# Altium PCB PCB1.PcbDoc
Units mm, origin at the board's own origin, x right, y up, seen from the top; angles counter-clockwise.
Board outline 200 x 100 mm, 2 copper layers (Top Layer, Bottom Layer); 33 components, 24 nets, 144 pads, 32 vias.
Unrouted connection lines stored in the file: 69.
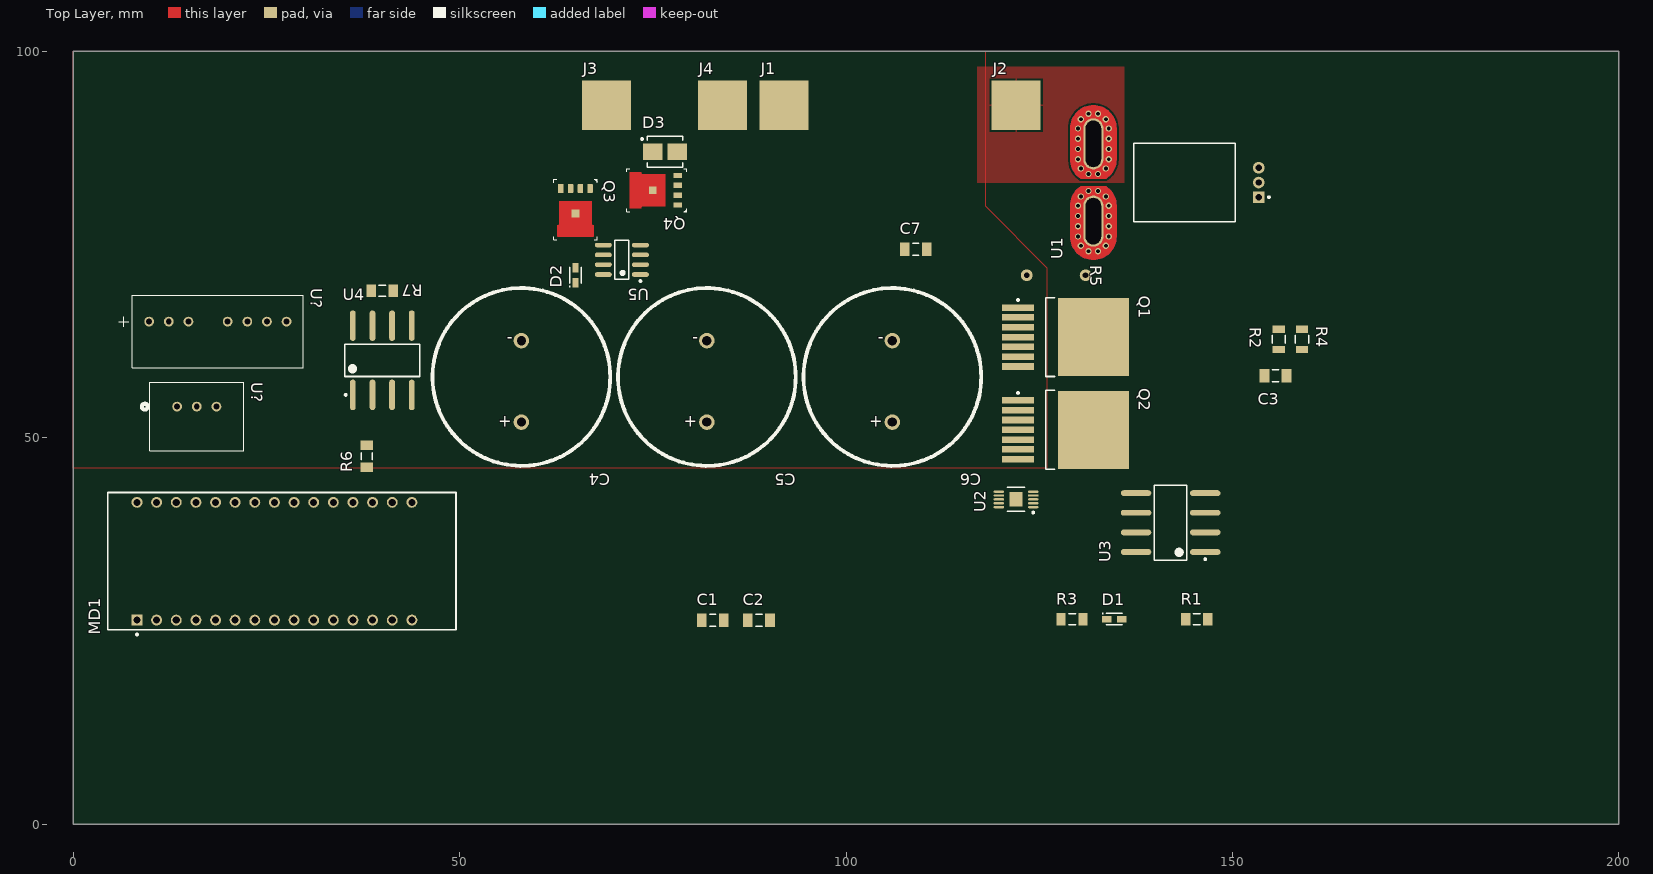
[diagram p0: Top Layer view]
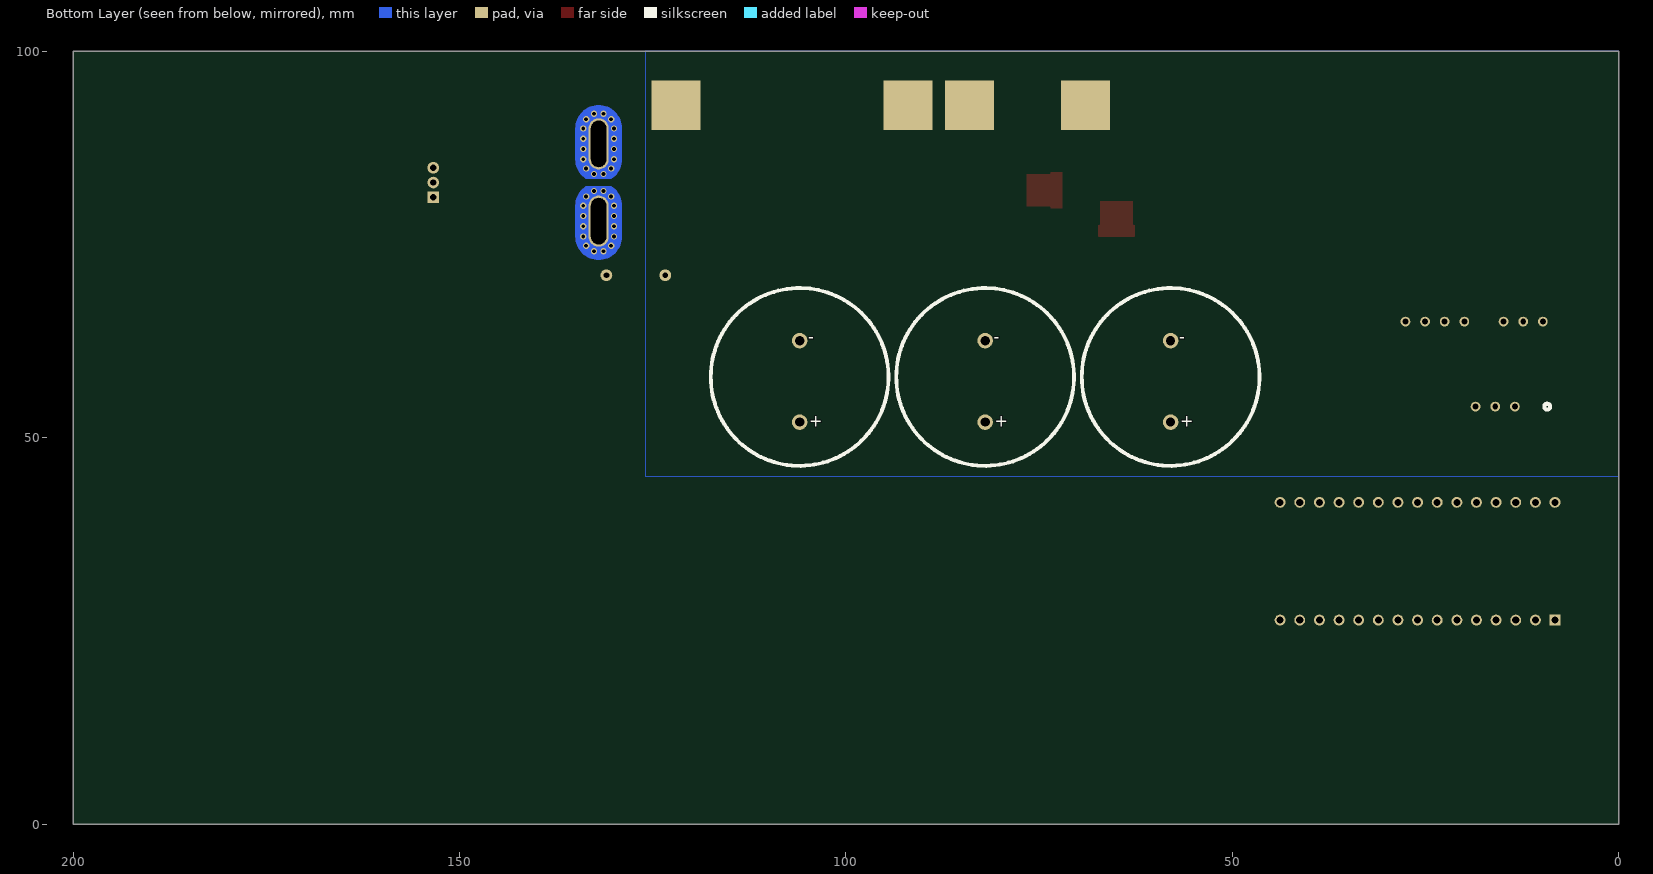
[diagram p1: Bottom Layer view, seen from below]

## Layer stack, top to bottom
Top Solder: solder mask 0.0102, Solder Resist, Dk 3.5
Top Layer: signal copper 0.0356
Dielectric 1: dielectric 0.32, FR-4, Dk 4.8
Bottom Layer: signal copper 0.0356
Bottom Solder: solder mask 0.0102, Solder Resist, Dk 3.5

## Board outline
0,0 0,100 200,100 200,0

## Design rules (kind name [scope] priority, off if disabled: settings)
Clearance [All] p1: gap=0.254 ignorepadtopadclearanceinfootprint=FALSE
PolygonConnect [All] p1: connectstyle=Relief reliefconductorwidth=0.254 reliefentries=4 polygonreliefangle="90 Angle" airgapwidth=0.254
RoutingVias [All] p1: holewidth=0.711 width=1.27 viastyle="Through Hole" minholewidth=0.711 minwidth=1.27 maxholewidth=0.711 maxwidth=1.27
SolderMaskExpansion [All] p1: expansion=0.102 istentingtop=FALSE
SupplyNets "Schematic Supply Nets_5" [InNet('DGND')] p1: voltage=0.000
SupplyNets "Schematic Supply Nets_4" [InNet('+5V_ISO')] p2: voltage=0.000
SupplyNets "Schematic Supply Nets_3" [InNet('BGND')] p3: voltage=0.000
SupplyNets "Schematic Supply Nets_2" [InNet('VDC')] p4: voltage=0.000
SupplyNets "Schematic Supply Nets_1" [InNet('+12V')] p5: voltage=0.000
SupplyNets "Schematic Supply Nets" [InNet('VBAT')] p6: voltage=0.000
Width [All] p1: maxlimit=0.254 minlimit=0.254 preferedwidth=0.254
30 further rules are at their usual default settings.

## Components (designator, comment, footprint, x,y, rotation, side; value= is the part's Value field where it differs from the comment)
C1 "C1206C104K1RACTU" CAPC3216X06N 82.763,26.374 r0 top value=100nF
C2 "C1206C104K1RACTU" CAPC3216X06N 88.732,26.374 r0 top value=100nF
C3 "C1206C104K1RACTU" CAPC3216X06N 155.575,58 r0 top value=100nF
C4 "UVR1J472MRD" UVR1J472MRD-Footprint-1 58,52 r180 top value=4.7mF
C5 "UVR1J472MRD" UVR1J472MRD-Footprint-1 82,52 r180 top value=4.7mF
C6 "UVR1J472MRD" UVR1J472MRD-Footprint-1 106,52 r180 top value=4.7mF
C7 "C1206C104K1RACTU" CAPC3216X06N 109.03,74.374 r0 top value=100nF
D1 "RB021VAM90TR" DIOM2014X08N 134.706,26.501 r0 top
D2 "RB021VAM90TR" DIOM2014X08N 65,71 r90 top
D3 "VSSB310-M3/52T" DIOM4336X24N 76.575,87 r0 top
J1 "GND" "Solder Pad" 92,93 r0 top
J2 "Battery" "Solder Pad" 122,93 r0 top
J3 "MOTOR" "Solder Pad" 69,93 r0 top
J4 "GND MOT" "Solder Pad" 84,93 r0 top
MD1 "A000005" FP-A000005-MFG 27,34 r90 top
Q1 "IPB014N06NATMA1" INF-PG-TO263-7-1_M 128.4,63 r0 top
Q2 "IPB014N06NATMA1" INF-PG-TO263-7-1_M 128.4,51 r0 top
Q3 "PSMN1R0-30YLDX" NXP-SOT669_L 66.905,82.294 r270 top
Q4 "PSMN1R0-30YLDX" NXP-SOT669_L 78.294,80.095 r180 top
R1 "CRGP1206F1K0" RESC3215X06N 145.374,26.501 r0 top value=1k
R2 "CRGP1206F330R" FP-CRGP1206-IPC_C 156,62.699 r270 top value=330
R3 "CRGP1206F1K0" RESC3215X06N 129.245,26.501 r0 top value=1k
R4 "CRGP1206F330R" FP-CRGP1206-IPC_C 159,62.699 r270 top value=330
R5 "RS2B-10 OHM-5%" "RS2B-10 OHM-5%-Footprint-1" 123.38,71 r270 top value=10
R6 "CRGP1206F1K0" RESC3215X06N 38,47.575 r90 top value=1k
R7 "CRGP1206F1K0" RESC3215X06N 40,69 r180 top value=1k
U1 "ACS770LCB-050U-PFF-T" FP-CB-5-PFF-MFG 143.809,83 r90 top
U2 "LTC7004EMSE#PBF" TSSOP50P490X110_HS-11N 122,42 r180 top
U3 "TLP2955(F)" SOJ254P890X365-8M 142,39 r180 top
U4 "TLP2955(F)" SOJ254P890X365-8M 40,60 r90 top
U5 "LM5104MX" M08A_N 71,73 r180 top
U? "TEC 2-4811WI" TEC2_TRP 9.84,65 r0 top
U? "TSR 0.6-48120WI" TSR0P6-WI_TRP 13.46,54 r0 top

## Footprints (in the part's own frame and the unit in brackets; to place one, negate y for a bottom-side part, rotate by r counter-clockwise, add the part's x,y. Pads: shape width x height; smd on the part's side, far side on the other; paste and mask are expansions set on the pad)
CAPC3216X06N [mm] "Chip Capacitor, 2-Leads, Body 3.20x1.60mm, IPC Medium Density"
  rect 1.25x1.75 smd: 1(-1.425,0) 2(1.425,0)
  silkscreen extent -0.4,-0.77 0.4,0.77, body extent -1.65,-0.85 1.65,0.85, height 0.6
DIOM2014X08N [mm] "Molded Diode, 2-Leads, Body 2.00x1.40mm, IPC Medium Density"
  rect 1.25x0.8 smd: 1(-0.95,0) 2(0.95,0)
  silkscreen extent -1.52,-0.75 1.05,0.8, body extent -1.27,-0.75 1.27,0.75, height 0.8
DIOM4336X24N [mm] "Molded Diode, 2-Leads, Body 4.31x3.62mm, IPC Medium Density"
  rect 2.5x2.15 smd: 1(-1.575,0) 2(1.575,0)
  silkscreen extent -3.07,-2 2.3,2, body extent -2.5,-1.97 2.5,1.97, height 2.44
FP-A000005-MFG [mil]
  rect 55.67x55.67 hole 35.98 paste-99999 mask+0: 1(-300,737.5)
  round 55.67 hole 35.98 paste-99999 mask+0: 2(-300,637.5) 3(-300,537.5) 4(-300,437.5) 5(-300,337.5) 6(-300,237.5) 7(-300,137.5) 8(-300,37.5) 9(-300,-62.5) 10(-300,-162.5) 11(-300,-262.5) 12(-300,-362.5) 13(-300,-462.5) 14(-300,-562.5) 15(-300,-662.5) 16(300,-662.5) 17(300,-562.5) 18(300,-462.5) 19(300,-362.5) 20(300,-262.5) 21(300,-162.5) 22(300,-62.5) 23(300,37.5) 24(300,137.5) 25(300,237.5) 26(300,337.5) 27(300,437.5) 28(300,537.5) 29(300,637.5) 30(300,737.5)
  silkscreen extent -379,-888 350,888, body extent -354,-891 354,891, height 10
FP-CB-5-PFF-MFG [mm]
  rect 1.5x1.5 hole 0.8 paste-2539.97 mask+0: 1(-1.91,-9.59)
  round 1.5 hole 0.8 paste-2539.97 mask+0: 2(0,-9.59) 3(1.91,-9.59)
  rrect100% 6.6x2.6 hole 2 slot 6 at 0 deg paste-2539.97 mask+0: 4(5,11.809) 5(-5,11.809)
  Top Layer region: -0.5,10.151 -1.581,9.166 -3,8.81 -3,8.81 -7,8.809 -8.302,9.107 -9.345,9.939 -9.925,11.142 -9.925,12.477 -9.345,13.68 -8.302,14.512 -7,14.809 -7,14.81 -3,14.81 -1.581,14.453 -0.5,13.468 -0.5,13.468
  Top Layer region: 0.5,13.468 1.581,14.453 3,14.809 3,14.809 7,14.81 8.302,14.512 9.345,13.68 9.925,12.477 9.925,11.142 9.345,9.939 8.302,9.107 7,8.809 7,8.809 3,8.809 1.581,9.166 0.5,10.151 0.5,10.151
  Bottom Layer region: -0.5,10.151 -1.581,9.166 -3,8.81 -3,8.81 -7,8.809 -8.302,9.107 -9.345,9.939 -9.925,11.142 -9.925,12.477 -9.345,13.68 -8.302,14.512 -7,14.809 -7,14.81 -3,14.81 -1.581,14.453 -0.5,13.468 -0.5,13.468
  Bottom Layer region: 0.5,13.468 1.581,14.453 3,14.809 3,14.809 7,14.81 8.302,14.512 9.345,13.68 9.925,12.477 9.925,11.142 9.345,9.939 8.302,9.107 7,8.809 7,8.809 3,8.809 1.581,9.166 0.5,10.151 0.5,10.151
  silkscreen extent -5.05,-11.04 5.05,6.55, body extent -10.1,-10.44 10.1,14.91, height 0.25
FP-CRGP1206-IPC_C [mm]
  rect 0.956x1.61 smd paste+0 mask+0: 1(-1.301,0) 2(1.301,0)
  silkscreen extent -0.52,-0.85 0.52,0.85, body extent -1.88,-0.95 1.88,0.95, height 0.25
INF-PG-TO263-7-1_M [mm] "DPAK, 8-Leads, Body 10x9.25mm, Pitch 1.27mm, IPC Low Density"
  rect 4.15x0.85 smd: 1(-6.15,3.81) 2(-6.15,2.54) 3(-6.15,1.27) 4(-6.15,0) 5(-6.15,-1.27) 6(-6.15,-2.54) 7(-6.15,-3.81)
  rect 9.2x10.1 smd: 8(3.6,0)
  silkscreen extent -6.27,-5.1 -1.4,5.1, body extent -2.55,-5.1 6.9,5.1, height 4.4
M08A_N [mm] "SOIC, 8-Leads, Body 4.9x3.9mm, Pitch 1.27mm, IPC Medium Density"
  oval 2.2x0.6 smd: 1(-2.4,1.905) 2(-2.4,0.635) 3(-2.4,-0.635) 4(-2.4,-1.905) 5(2.4,-1.905) 6(2.4,-0.635) 7(2.4,0.635) 8(2.4,1.905)
  silkscreen extent -2.53,-2.5 0.9,2.88, body extent -2,-2.5 2,2.5, height 1.75
NXP-SOT669_L [mm] "DPAK, 4-Leads, Body 5x4.1mm, Pitch 1.27mm, IPC High Density"
  rrect25% 1.15x0.7 smd: 1(0.069,0) 2(0.069,-1.27) 3(0.069,-2.54) 4(0.069,-3.81)
  rrect0% 1x1 smd paste-1: 5(3.294,-1.905)
  Top Layer region: 1.694,0.095 1.694,-3.905 1.694,-3.925 1.709,-3.962 1.737,-3.99 1.774,-4.005 1.794,-4.005 1.794,-4.005 4.694,-4.005 4.713,-4.007 4.75,-4.022 4.777,-4.049 4.792,-4.085 4.794,-4.105 4.794,-4.105 4.794,-4.155 4.794,-4.175 4.809,-4.212 4.837,-4.24 4.874,-4.255 4.894,-4.255 4.894,-4.255 6.194,-4.255 6.214,-4.255 6.251,-4.24 6.279,-4.212 6.294,-4.175 6.294,-4.155 6.294,-4.155 6.294,0.345 6.294,0.365 6.279,0.402 6.251,0.43 6.214,0.445 6.194,0.445 6.194,0.445 4.894,0.445 4.874,0.445 4.837,0.43 4.809,0.402 4.794,0.365 4.794,0.345 4.794,0.345 4.794,0.295 4.792,0.275 4.777,0.239 4.75,0.212 4.714,0.197 4.694,0.195 4.694,0.195 1.794,0.195 1.774,0.195 1.737,0.18 1.709,0.152 1.694,0.115 1.694,0.095
  silkscreen extent -1.11,-4.7 6.69,0.89, body extent -0.43,-4.35 5.99,0.55, height 1.1
RESC3215X06N [mm] "Chip Resistor, 2-Leads, Body 3.15x1.53mm, IPC Medium Density"
  rect 1.2x1.65 smd: 1(-1.425,0) 2(1.425,0)
  silkscreen extent -0.45,-0.72 0.45,0.72, body extent -1.68,-0.82 1.68,0.82, height 0.65
"RS2B-10 OHM-5%-Footprint-1" [mil]
  round 60 hole 30: 1(0,0) 2(0,300)
SOJ254P890X365-8M [mm] "SOJ, 8-Leads, Body 9.66x8.89mm, Pitch 2.54mm, IPC Low Density"
  oval 3.95x0.75 smd: 1(-4.475,3.81) 2(-4.475,1.27) 3(-4.475,-1.27) 4(-4.475,-3.81) 5(4.475,-3.81) 6(4.475,-1.27) 7(4.475,1.27) 8(4.475,3.81)
  silkscreen extent -4.6,-4.85 2.1,4.86, body extent -4.64,-4.83 4.64,4.83, height 3.65
"Solder Pad" [mm]
  rect 6.35x6.35 all layers, no hole: 1(0,0)
TEC2_TRP [mil]
  round 50 / inner round 60 / far side round 50 hole 30 paste-99999 mask+0: 1(0,0) 2(100,0) 3(200,0) 5(400,0) 6(500,0) 7(600,0) 8(700,0)
  silkscreen extent -155,-235 785,135, body extent -80,-180 780,180, height 440
TSR0P6-WI_TRP [mil]
  round 50 / inner round 60 / far side round 50 hole 30 paste-99999 mask+0: 1(0,0) 2(100,0) 3(200,0)
  silkscreen extent -180,-225 340,125, body extent -124,-215 325,106, height 528
TSSOP50P490X110_HS-11N [mm] "TSSOP, 10-Leads, Body 3.00x3.00mm, Pitch 0.50mm, Thermal Pad 1.88x1.68mm, IPC Medium Density"
  oval 1.35x0.3 smd: 1(-2.225,1) 2(-2.225,0.5) 3(-2.225,0) 4(-2.225,-0.5) 5(-2.225,-1) 6(2.225,-1) 7(2.225,-0.5) 8(2.225,0) 9(2.225,0.5) 10(2.225,1)
  rect 1.68x1.88 smd: 11(0,0)
  silkscreen extent -2.35,-1.55 1.15,1.82, body extent -2.45,-1.55 2.45,1.55, height 1.1
UVR1J472MRD-Footprint-1 [mm]
  round 2 hole 1.2: 1(0,0) 2(0,-10.541)
  silkscreen extent -11.5,-17.34 11.5,5.66, body extent -11.37,-17.27 11.63,5.73, height 50

## Part data
C1 C2 C3 C7: library part CMP-001-00083-1, "Ceramic Capacitor, Multilayer, Ceramic, 200V, 10% +Tol, 10% -Tol, X7R, 15% TC, 0.01uF, 1206", Case/Package=1206, Max Operating Temperature=125°C, Min Operating Temperature=-55°C, Tolerance=10%, Voltage Rating=100V, Mounting Technology="Surface Mount", Pins=2
C4 C5 C6: library part CMP-001-00084-3, "Radial Can ALUMINUM ELECTROLYTIC CAPACITOR UVR 63V 4700muF ±20% 0.866Dia 22.00mm", Case/Package=Radial, Max Operating Temperature=85°C, Min Operating Temperature=-40°C, Ripple Current=3.2A, Tolerance=20%, Voltage Rating=63V, Mounting Technology="Through Hole", Pins=2
D1 D2: library part CMP-004-00031-1, "Rectifier Diode, Schottky, 1 Phase, 1 Element, 0.2A, 90V V(RRM), Silicon", Forward Current=200mA, Max Operating Temperature=125°C, Mounting Technology="Surface Mount"
D3: library part CMP-004-00032-1, "Rectifier Diode, Schottky, 1 Phase, 1 Element, 1.9A, 100V V(RRM), Silicon, DO-214AA", Forward Voltage=700mV, Max Operating Temperature=150°C, Min Operating Temperature=-40°C, Mounting Technology="Surface Mount"
J1 J2 J3 J4: library part CMP-002-00071-1, "Solder Pad for soldering wires to the board"
MD1: library part CMP-020-00023-1, "ATmega328 Microcontroller Development Board 16MHz CPU 2KB RAM 1KB/32KB EEPROM/Flash", Frequency=16MHz, Max Supply Voltage=12V, Min Supply Voltage=7V, Interface="I2C, SPI, USB"
Q1 Q2: library part CMP-00000-4, "Power MOSFET, N Channel, 60 V, 180 A, 0.0012 ohm, TO-263 (D2PAK), Surface Mount", Case/Package=TO-263-7, Continuous Drain Current (ID)=34A, Drain to Source Breakdown Voltage=60V, Drain to Source Resistance=1.4mΩ, Gate to Source Voltage (Vgs)=20V, Max Power Dissipation=214W, Drain to Source Voltage (Vdss)=60V
Q3 Q4: library part CMP-013-00029-6, "N-channel Logic Level MOSFET, 30 V, 300 A, -55 to 175 degC, 5-Pin SOT669, RoHS, Tape and Reel", Pins=5, RoHS Compliant=True, Transistor Type=1N-Channel, Vgs (Max)=20V
R1 R3 R6 R7: library part CMP-009-00177-1, "Res Thick Film 1206 1K Ohm 1% 0.5W(1/2W) ±100ppm/C Pad SMD T/R Automotive AEC-Q200", Case/Package=1206, Max Operating Temperature=155°C, Min Operating Temperature=-55°C, Tolerance=1%, Voltage Rating=200V, Mounting Technology="Surface Mount"
R2 R4: library part CMP-009-00181-1, "Res Thick Film 1206 330 Ohm 1% 0.5W(1/2W) ±100ppm/°C Pad SMD T/R Automotive AEC-Q200", Case/Package=1206, Max Operating Temperature=155°C, Min Operating Temperature=-55°C, Tolerance=1%, Voltage Rating=200V, Mounting Technology="Surface Mount"
R5: library part CMP-009-00178-1, "Fixed Resistor, Wire Wound, 3W, 10ohm, 5.4772V, 5% +/-Tol, 20ppm/Cel, Through Hole Mount", Case/Package=Axial, Max Operating Temperature=250°C, Min Operating Temperature=-65°C, Power Dissipation=3W, Tolerance=5%
U1: library part CMP-010-00024-1, "4.1 μs output rise time in response to step input current", Max Operating Temperature=150°C, Max Supply Voltage=5.5V, Min Operating Temperature=-40°C, Min Supply Voltage=4.5V
U2: library part CMP-00024-00007-2, "RoHS Compliant PRODUCTION (Last Updated: 2weeks ago) MSOP IC Gate Driver", Case/Package=MSOP, Pins=10
U3 U4: library part CMP-00026-00001-4, "Optocoupler Logic-Out Totem-Pole DC-IN 1-CH 8-Pin PDIP", Case/Package=DIP, Max Operating Temperature=125°C, Min Operating Temperature=-40°C, Pins=8
U5: library part CMP-00024-00006-3, "MOSFET DRVR 1.8A 2-OUT Hi/Lo Side Full Brdg/Half Brdg Inv/Non-Inv 8-Pin SOIC N T/R", Case/Package=SOIC, Max Operating Temperature=125°C, Min Operating Temperature=-40°C, Nominal Supply Current=3mA, Mounting Technology="Surface Mount", Pins=8
U?: library part CMP-019-00050-2, "DC/DC converter, 18-75 VDC, 2 W, 1 output, 5 VDC, 79 % efficiency, TEC 2-4811WI", Max Operating Temperature=93°C, Max Supply Voltage=75V, Min Operating Temperature=-40°C
U?: library part CMP-019-00049-2, "DC-DC Regulated Power Supply Module, 1 Output, 7.2W, Hybrid", Max Operating Temperature=85°C, Max Supply Voltage=72V, Min Operating Temperature=-40°C

## Via types
v1: diameter 0.8, hole 0.5, Top Layer to Bottom Layer, 32 vias

## Nets (pads, with @x,y where several pads share a name; then routed paths per layer and width w, separated by ;. In a path a pad name is that pad's centre, name@x,y a point inside that pad or via, vN(x,y) a via of type N, cw(c..) or ccw(c..) an arc to the next point about the centre after c; other vN are vias at no path point)
+5V_ISO: MD1.27 U1.1 U?.6
+12V: D1.2 D2.2 U2.1 U3.8 U4.8 U5.1 U?.3@18.54,54
BGND: C4.2 C5.2 C6.2 D3.2 J1.1 J4.1 Q4.1 Q4.2 Q4.3 R3.1 R7.1 U2.2 U2.3 U2.5 U2.11 U3.5 U4.5 U5.5 U5.7 U?.1@9.84,65
DGND: C3.1 MD1.4 MD1.29 U1.2 U3.3 U4.3 U?.7
DRIVE: MD1.14 R6.2
G_soft: Q2.1 U2.6 U2.7
Isense: C3.2 MD1.19 R2.2 R4.2
"MOTOR SW": C7.1 D3.1 J3.1 Q3.1 Q3.2 Q3.3 Q4.5 U5.4
NetC1_2: C1.2 C2.2 D1.1 U2.9
NetC7_2: C7.2 D2.1 U5.2
NetJ2_1: J2.1 U1.4
  other v1: 131.382,84.098 132.618,84.098 130.382,84.824 133.618,84.824 130,86 134,86 130,87.333 134,87.333 130,88.667 134,88.667 130,90 134,90 130.382,91.176 133.618,91.176 131.382,91.902 132.618,91.902
NetQ3_2: Q3.4 U5.3
NetQ4_2: Q4.4 U5.8
NetR1_1: R1.1 U3.2
NetR2_1: R2.1 R4.1 U1.3
NetR3_2: R3.2 U2.4 U3.7
NetR6_1: R6.1 U4.2
NetR7_2: R7.2 U4.7 U5.6
NetU3_1: U3.1 U3.4 U3.6
NetU4_1: U4.1 U4.4 U4.6
SOFT: MD1.5 R1.2
Throttle: MD1.20
VBAT: Q1.8 Q2.8 R5.2 U1.5
  other v1: 131.382,74.098 132.618,74.098 130.382,74.824 133.618,74.824 130,76 134,76 130,77.333 134,77.333 130,78.667 134,78.667 130,80 134,80 130.382,81.176 133.618,81.176 131.382,81.902 132.618,81.902
VDC: C1.1 C2.1 C4.1 C5.1 C6.1 Q1.2 Q1.3 Q1.5 Q1.6 Q1.7 Q2.2 Q2.3 Q2.5 Q2.6 Q2.7 Q3.5 R5.1 U2.8 U?.1@13.46,54 U?.2@12.38,65
pads on no net: MD1.1 MD1.2 MD1.3 MD1.6 MD1.7 MD1.8 MD1.9 MD1.10 MD1.11 MD1.12 MD1.13 MD1.15 MD1.16 MD1.17 MD1.18 MD1.21 MD1.22 MD1.23 MD1.24 MD1.25 MD1.26 MD1.28 MD1.30 Q1.1 Q1.4 Q2.4 U2.10 U?.2@16,54 U?.3@14.92,65 U?.5 U?.8

## Polygon pours and split planes (outlines as drawn)
BGND on Bottom Layer "NONET_L02_P000" (solid, remove dead copper, shelved, pour order 0): 0,100 126,100 126,45 0,45
NetJ2_1 on Top Layer "NETJ2_1_L01_P002" (solid, pour order 2): 117,98 118,98 136,98 136,83 117,83
VDC on Top Layer "NONET_L01_P001" (solid, shelved, pour order 1): 0,100 118,100 118,80 126,72 126,46 0,46

## Text inside footprints (layer, text, board x,y; h text height)
C4: Top Overlay "-" at 56.857,63.43 h1.52 r180; Top Overlay "+" at 56.73,52.762 h1.52 r180; Bottom Overlay "-" at 56.857,63.43 h1.52 r180; Bottom Overlay "+" at 56.73,52.762 h1.52 r180
C5: Top Overlay "-" at 80.857,63.43 h1.52 r180; Top Overlay "+" at 80.73,52.762 h1.52 r180; Bottom Overlay "-" at 80.857,63.43 h1.52 r180; Bottom Overlay "+" at 80.73,52.762 h1.52 r180
C6: Top Overlay "-" at 104.857,63.43 h1.52 r180; Top Overlay "+" at 104.73,52.762 h1.52 r180; Bottom Overlay "-" at 104.857,63.43 h1.52 r180; Bottom Overlay "+" at 104.73,52.762 h1.52 r180